# EAGLE board BigEasyDriver-Panel-v15 (EAGLE 6.4), part 1 of 6
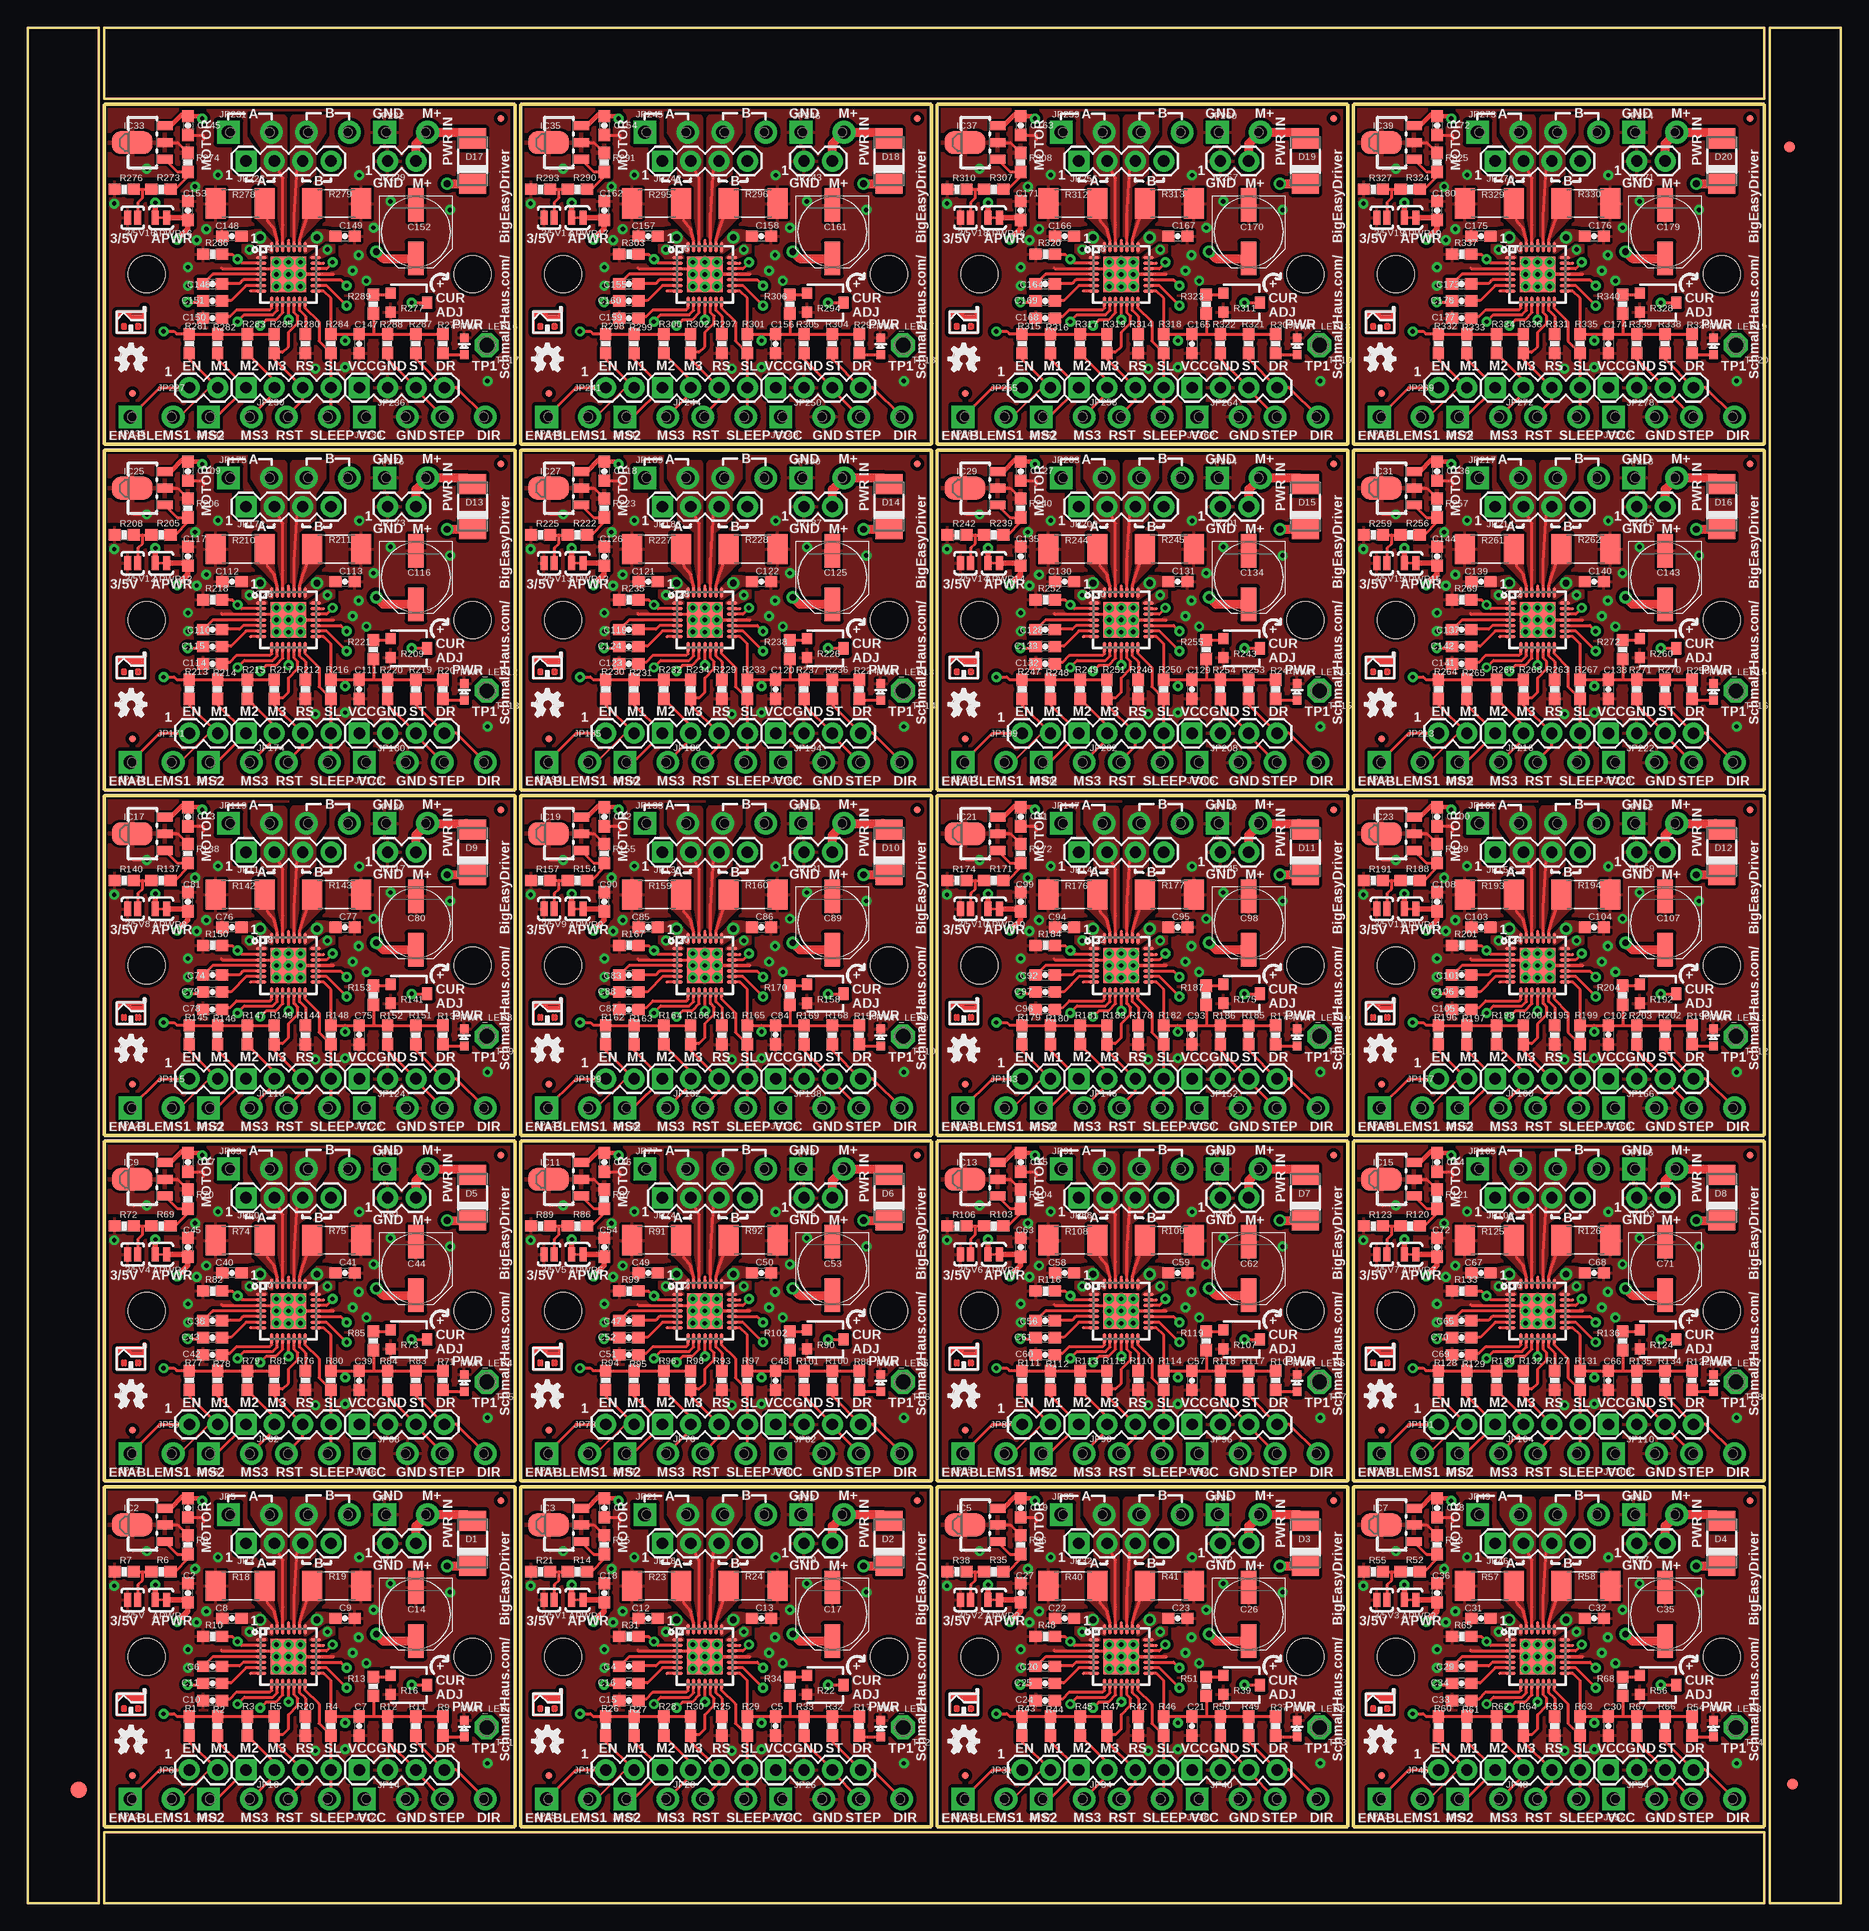
[diagram p0: board, top side]
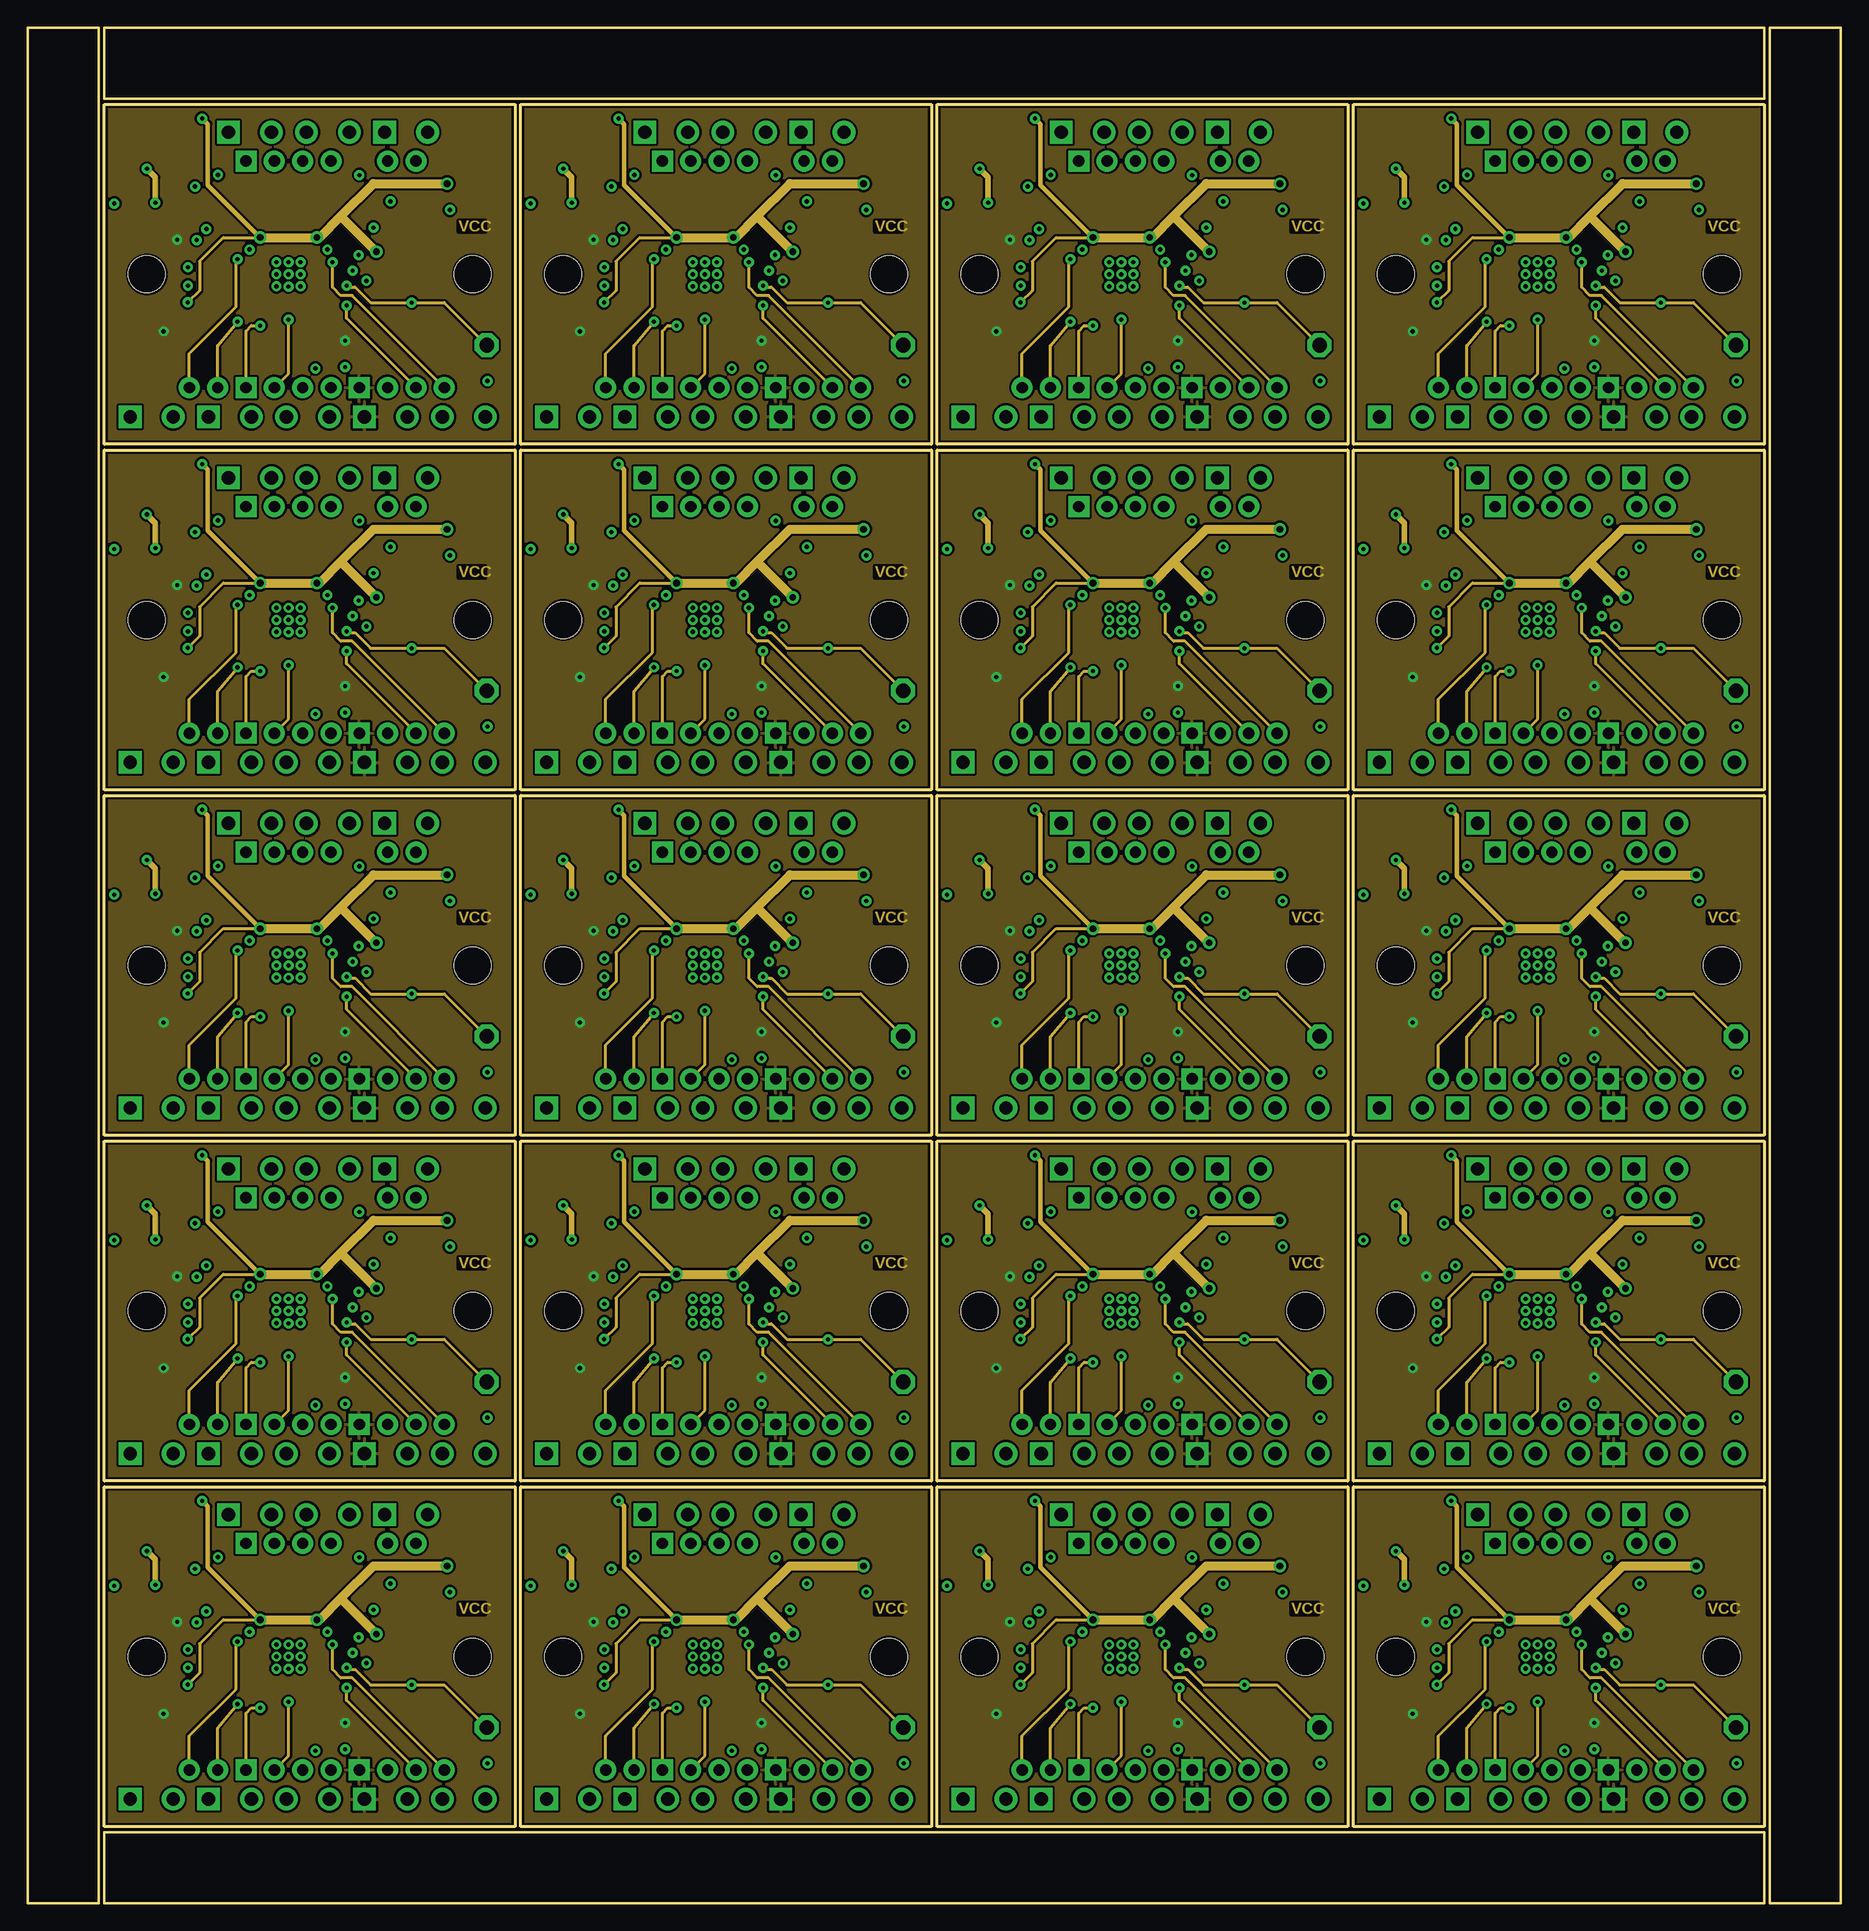
[diagram p1: board, inner layer VCC]
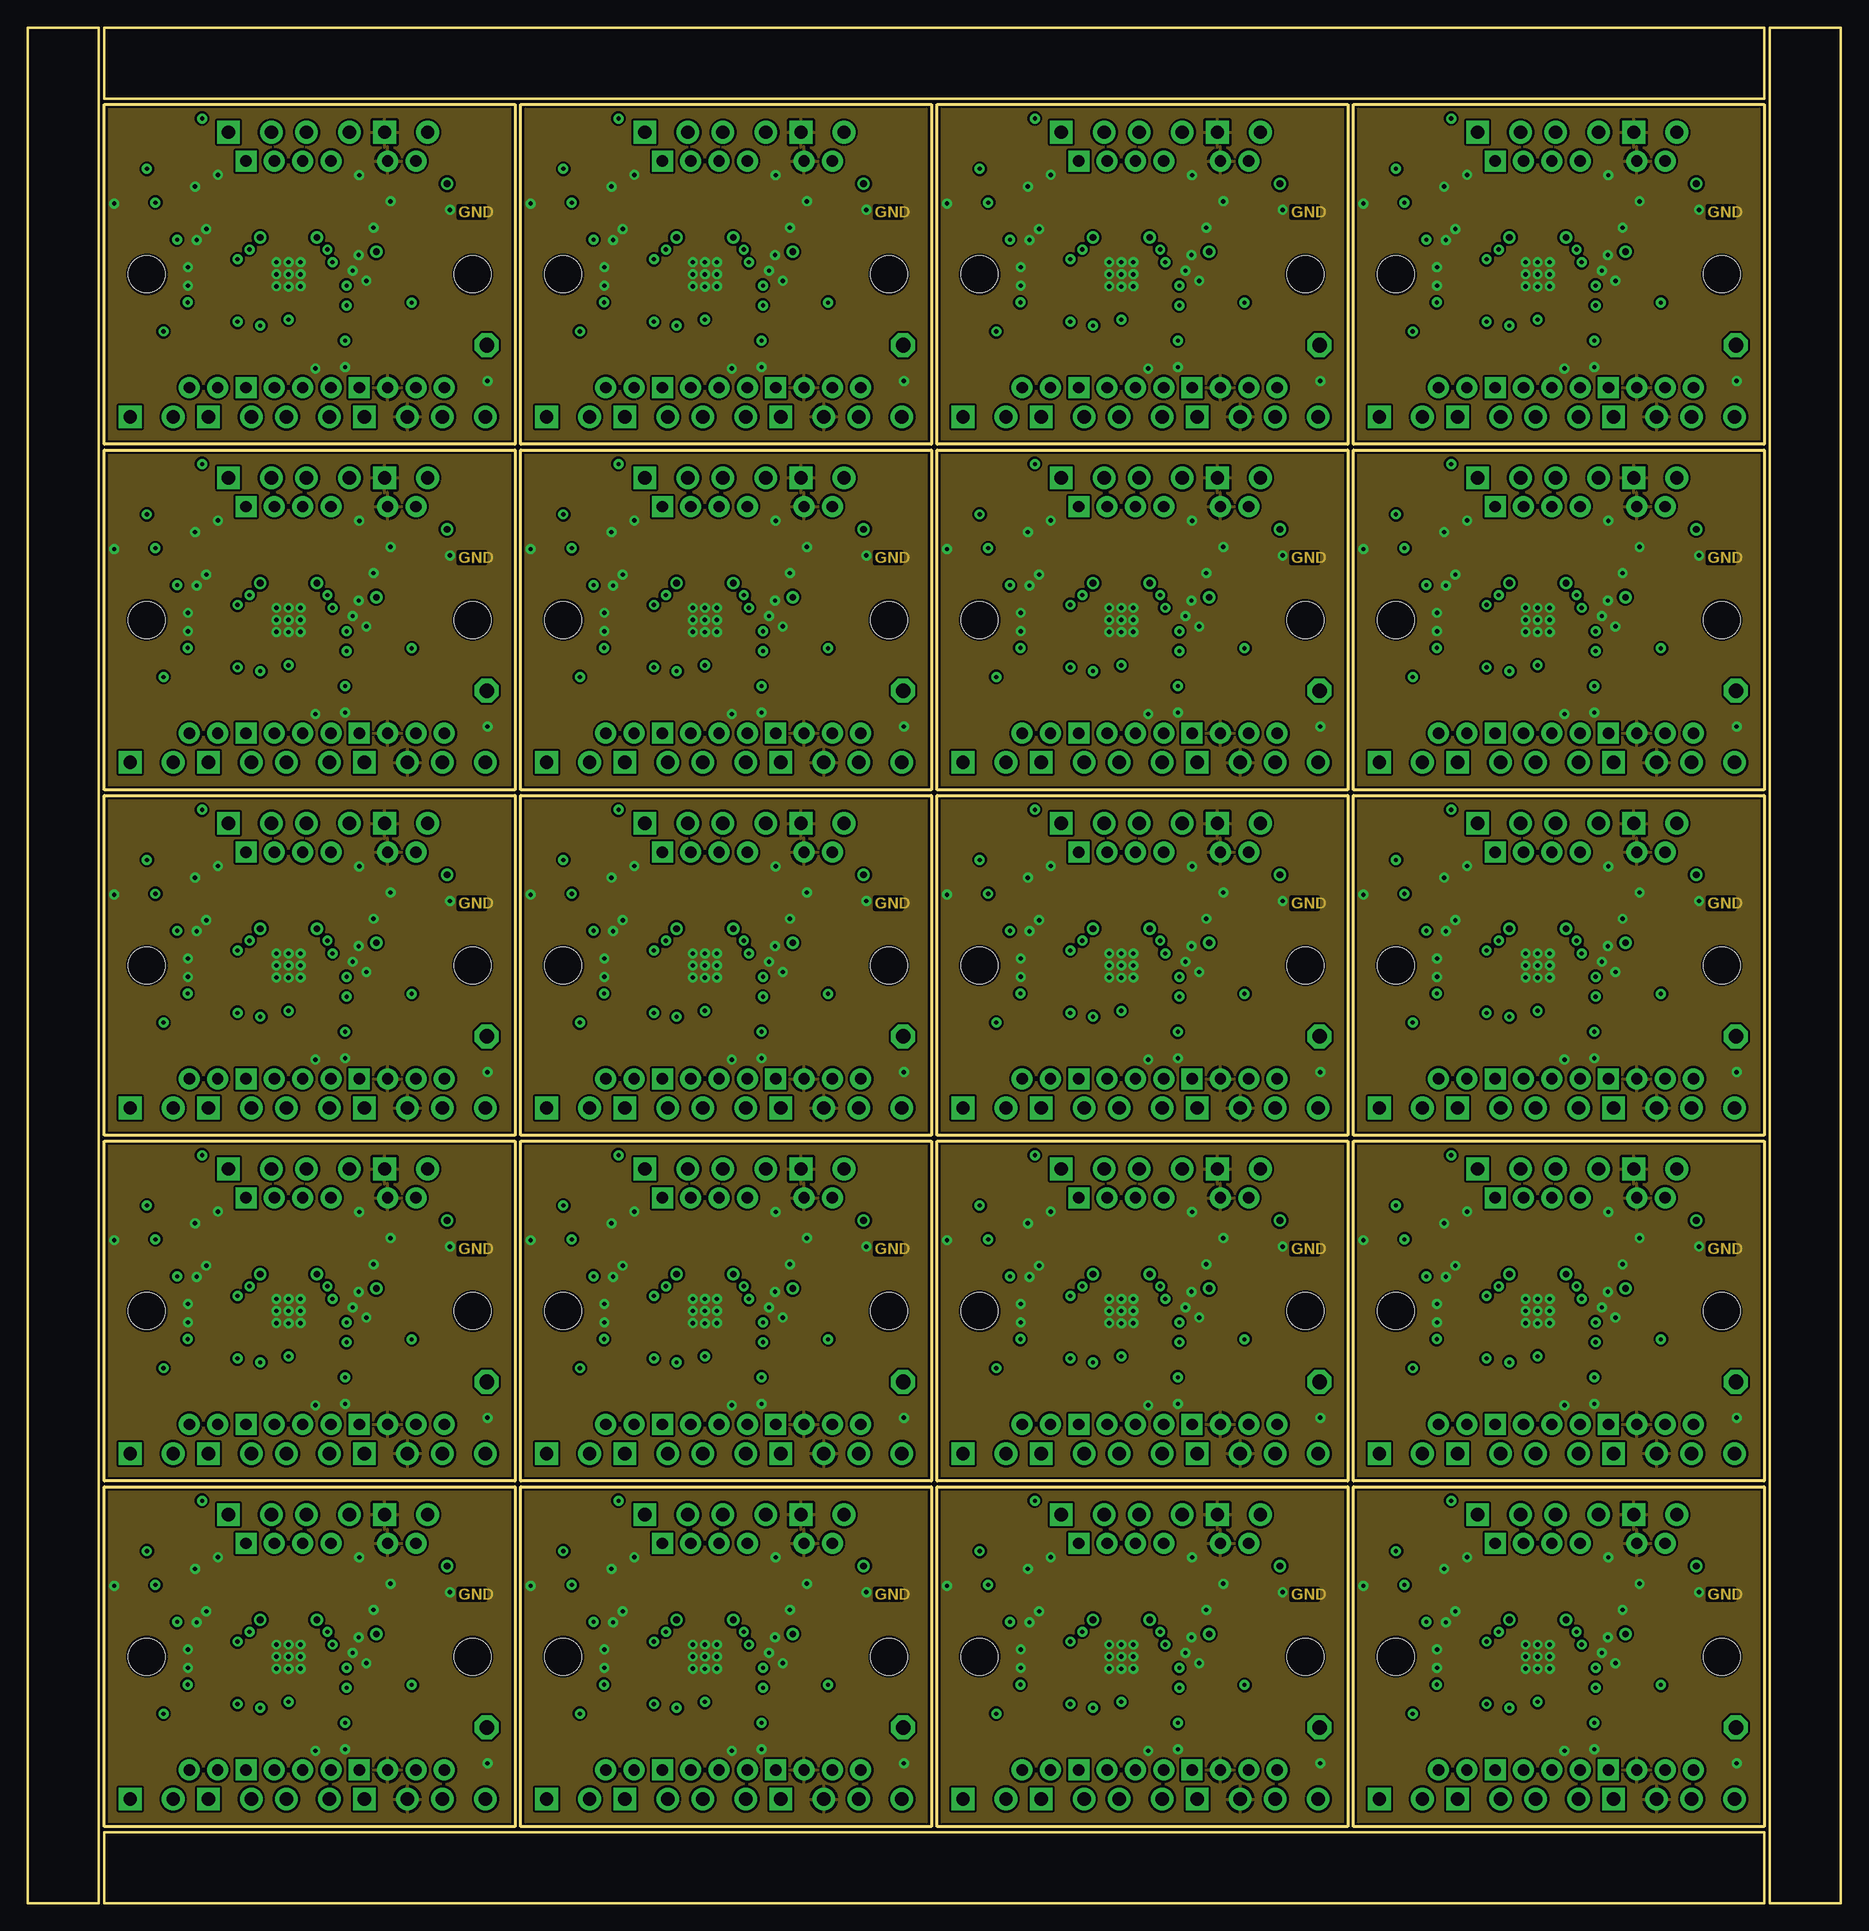
[diagram p2: board, inner layer GND]
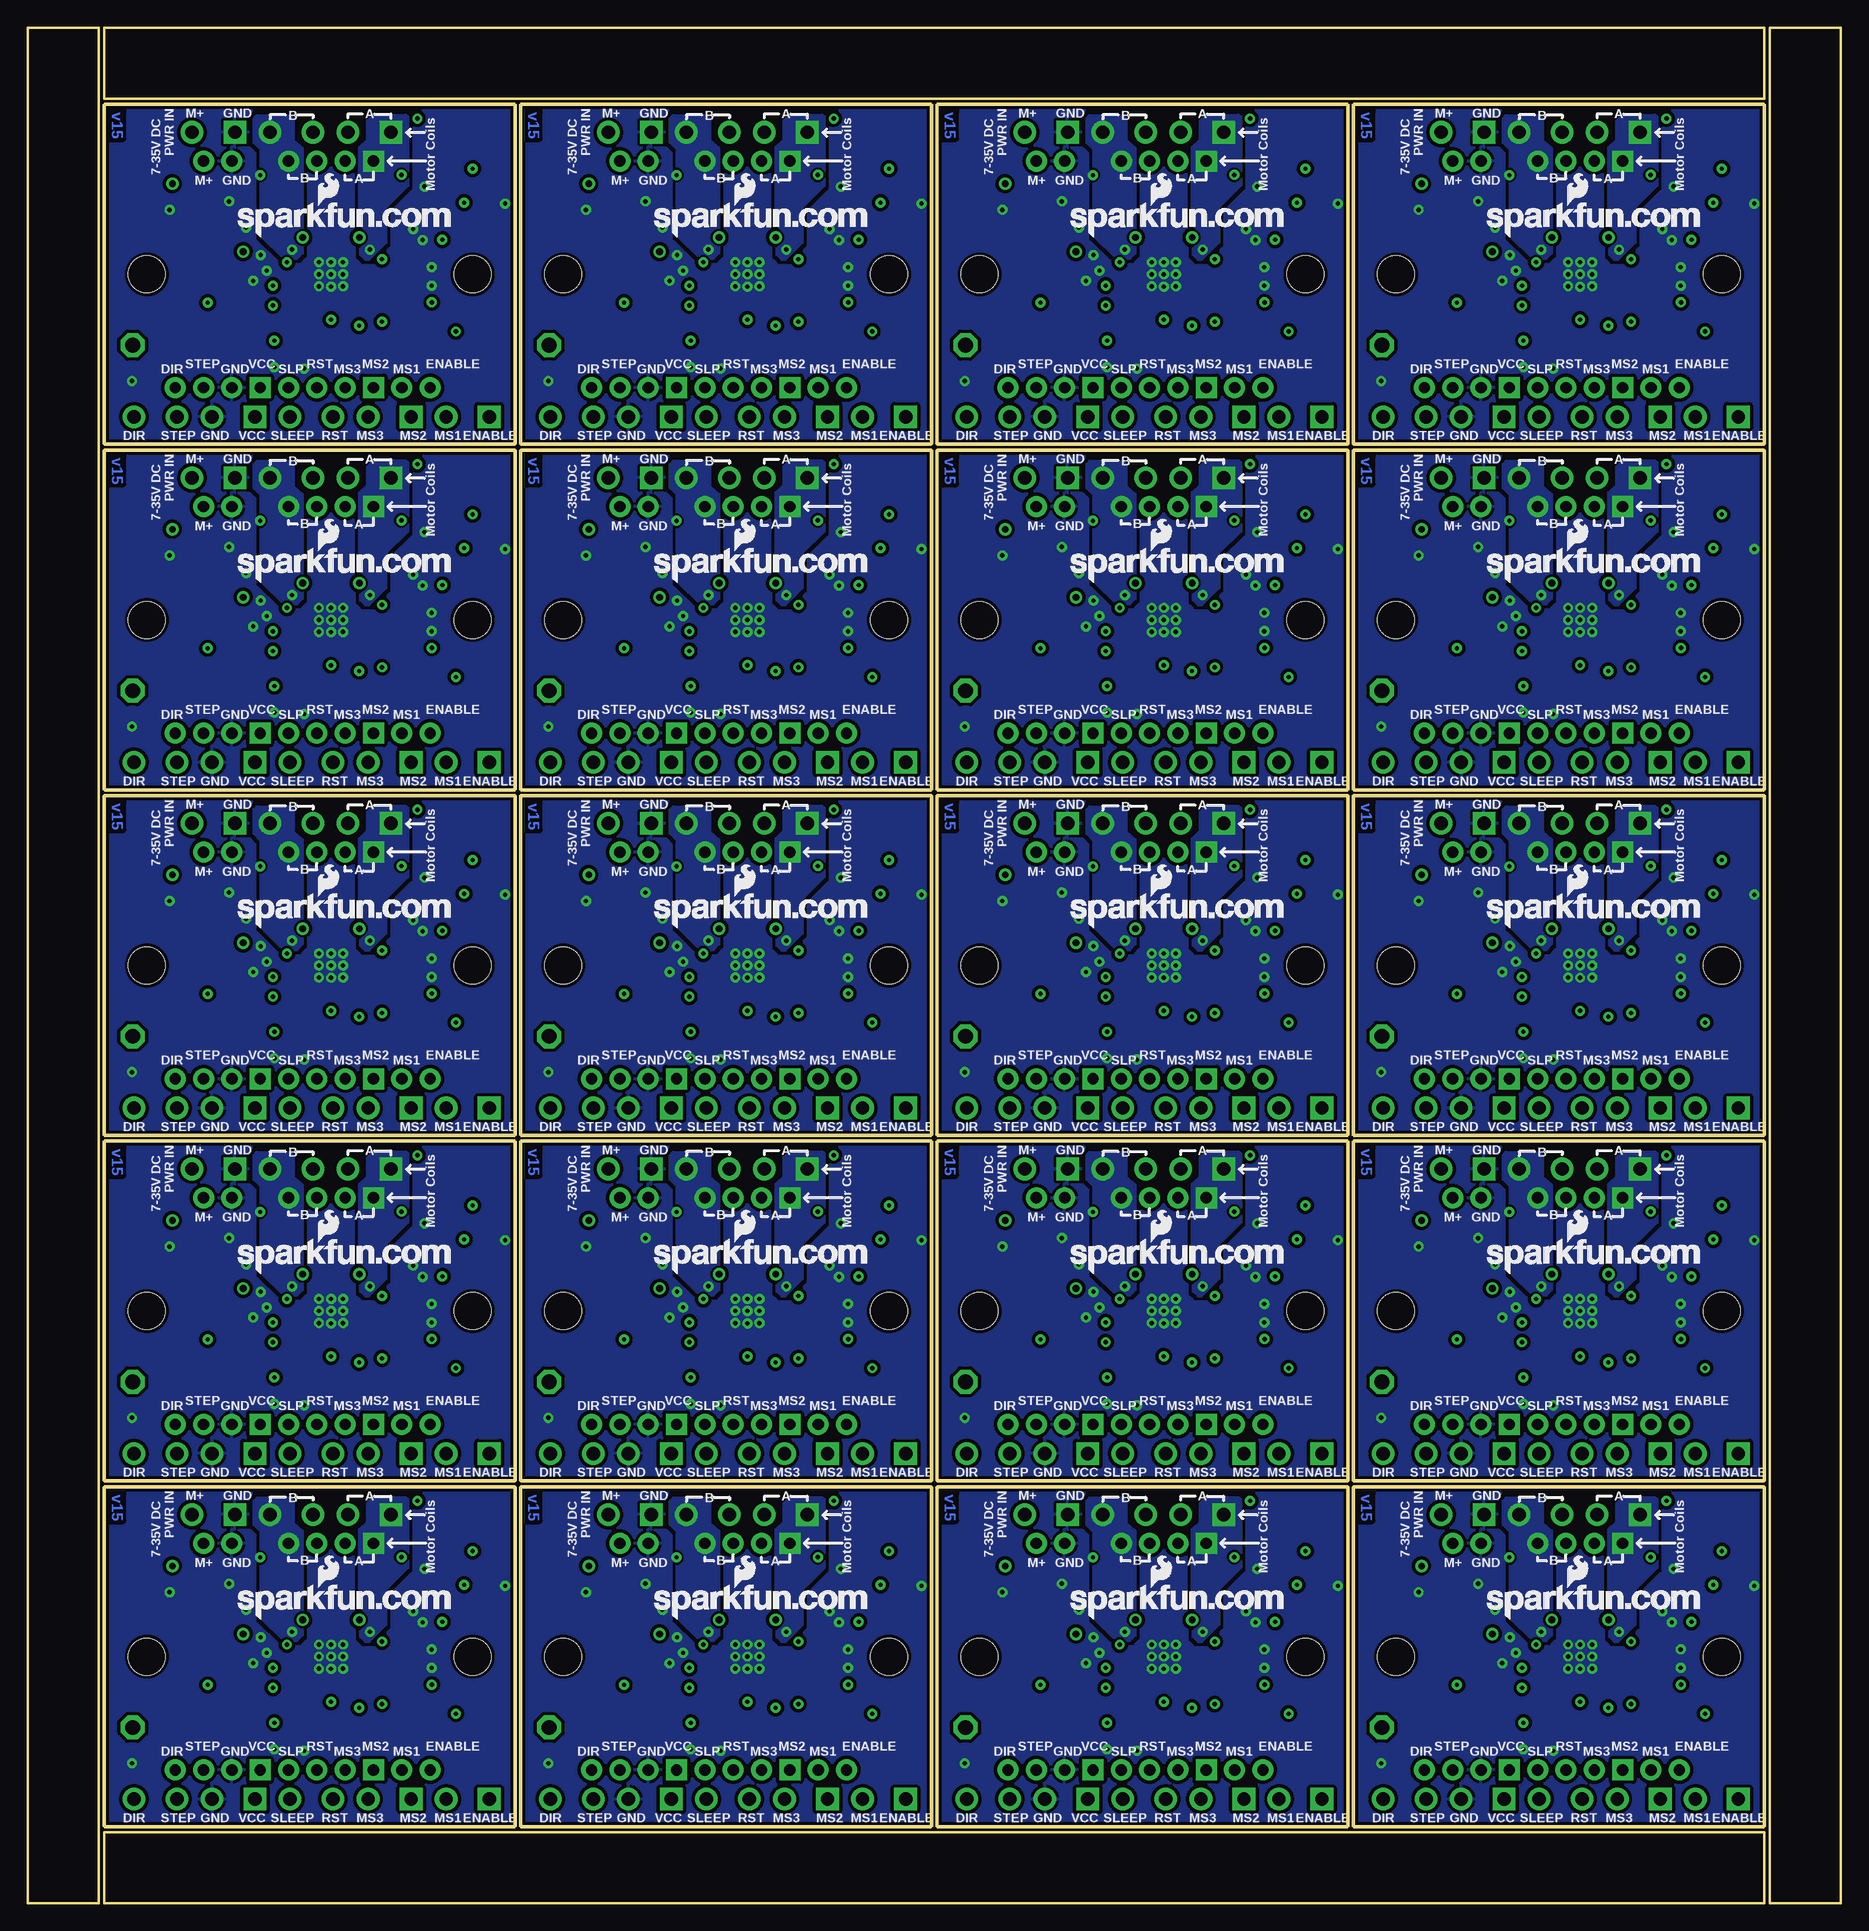
[diagram p3: board, bottom side, seen from below]

Size 162.56 x 168.15 mm. Coordinates in mm from the lower left corner, seen from the top.
Outline: 6.86,37.34 43.69,37.34 43.69,6.86 6.86,6.86 6.86,37.34
Outline: 44.2,37.34 81.03,37.34 81.03,6.86 44.2,6.86 44.2,37.34
Outline: 81.53,37.34 118.36,37.34 118.36,6.86 81.53,6.86 81.53,37.34
Outline: 118.87,37.34 155.7,37.34 155.7,6.86 118.87,6.86 118.87,37.34
Outline: 6.86,68.33 43.69,68.33 43.69,37.85 6.86,37.85 6.86,68.33
Outline: 44.2,68.33 81.03,68.33 81.03,37.85 44.2,37.85 44.2,68.33
Outline: 81.53,68.33 118.36,68.33 118.36,37.85 81.53,37.85 81.53,68.33
Outline: 118.87,68.33 155.7,68.33 155.7,37.85 118.87,37.85 118.87,68.33
Outline: 6.86,99.31 43.69,99.31 43.69,68.83 6.86,68.83 6.86,99.31
Outline: 44.2,99.31 81.03,99.31 81.03,68.83 44.2,68.83 44.2,99.31
Outline: 81.53,99.31 118.36,99.31 118.36,68.83 81.53,68.83 81.53,99.31
Outline: 118.87,99.31 155.7,99.31 155.7,68.83 118.87,68.83 118.87,99.31
Outline: 6.86,130.3 43.69,130.3 43.69,99.82 6.86,99.82 6.86,130.3
Outline: 44.2,130.3 81.03,130.3 81.03,99.82 44.2,99.82 44.2,130.3
Outline: 81.53,130.3 118.36,130.3 118.36,99.82 81.53,99.82 81.53,130.3
Outline: 118.87,130.3 155.7,130.3 155.7,99.82 118.87,99.82 118.87,130.3
Outline: 6.86,161.29 43.69,161.29 43.69,130.81 6.86,130.81 6.86,161.29
Outline: 44.2,161.29 81.03,161.29 81.03,130.81 44.2,130.81 44.2,161.29
Outline: 81.53,161.29 118.36,161.29 118.36,130.81 81.53,130.81 81.53,161.29
Outline: 118.87,161.29 155.7,161.29 155.7,130.81 118.87,130.81 118.87,161.29
Outline: 6.35,0 6.35,168.15 0,168.15 0,0 6.35,0
Outline: 6.86,0 155.7,0 155.7,6.35 6.86,6.35 6.86,0
Outline: 162.56,0 162.56,168.15 156.21,168.15 156.21,0 162.56,0
Outline: 155.7,168.15 6.86,168.15 6.86,161.8 155.7,161.8 155.7,168.15
Copper layers (1*16): Top 0.035mm / dielectric 1.5mm / Bottom 0.035mm
Design rules "SparkFun *": minimum track width 7mil, minimum drill 15mil, track to track 8mil, track to pad 8mil, pad to pad 8mil, via to via 8mil, smd to smd 8mil, copper to edge 8mil, drill to drill 8mil, minimum pad ring 12mil, minimum via ring 10mil, stop-mask expansion 4mil, vias tented up to drill 24mil, thermal gap 10mil

## Footprints (pad centres in the part's own frame; a part is rotated, then mirrored left to right if it is on the bottom)
SJ_2S-NO = smd 0.635 x 1.27: 1 -0.45,0; 2 0.45,0
SJ_2S-TRACE = smd 0.635 x 1.27: 1 -0.508,0; 2 0.508,0
0603-CAP = smd 1.1 x 1: 1 -0.85,0; 2 0.85,0
PANASONIC_D = smd 3 x 1.4: + 2.4,0; - -2.4,0
DO-214AC = smd 1.8 x 2.4: A 2.025,0; C -2.025,0
FIDUCIAL-1.5X3 = smd 1.5 x 1.5: 1 0,0
FIDUCIAL-1X2 = smd 1 x 1: 1 0,0
QFN-28-5MM_ALT1 = smd 0.94 x 0.3: P$1 -2.44,1.5; P$2 -2.44,1; P$3 -2.44,0.5; P$4 -2.44,0; P$5 -2.44,-0.5; P$6 -2.44,-1; P$7 -2.44,-1.5; P$15 2.44,-1.5; P$16 2.44,-1; P$17 2.44,-0.5; P$18 2.44,0; P$19 2.44,0.5; P$20 2.44,1; P$21 2.44,1.5 | smd 0.3 x 0.94: P$8 -1.5,-2.44; P$9 -1,-2.44; P$10 -0.5,-2.44; P$11 0,-2.44; P$12 0.5,-2.44; P$13 1,-2.44; P$14 1.5,-2.44; P$22 1.5,2.44; P$23 1,2.44; P$24 0.5,2.44; P$25 0,2.44; P$26 -0.5,2.44; P$27 -1,2.44; P$28 -1.5,2.44 | smd 3.175 x 3.175: P$29 0,0
SCHMALZHAUS_SOT89 = smd 0.8 x 1.4: ADJ -1.499,-1.981; IN 1.499,-1.981; OUT 0,-1.98 | smd 2.032 x 3.65: OUT@1 0,0.94
1X02 = drill 1.016 pad 1.88: 1 0,0; 2 2.54,0
FIDUCIAL-1X2.5 = smd 0.635 x 0.635: 1 0,0
1X04 = drill 1.016 pad 1.88 square: 1 0,0 | drill 1.016 pad 1.88: 2 2.54,0; 3 5.08,0; 4 7.62,0
SCREWTERMINAL-3.5MM-4_LOCK = drill 1.2 pad 2.032 square: 1 -0.178,0 | drill 1.2 pad 2.032: 2 3.678,0; 3 6.822,0; 4 10.678,0
SCREWTERMINAL-3.5MM-2_LOCK = drill 1.2 pad 2.032 square: 1 -0.178,0 | drill 1.2 pad 2.032: 2 3.678,0
STAND-OFF = hole 3.302: 0,0
LED-0603 = smd 0.8 x 0.8: A 0,-0.75; C 0,0.75
0603-RES = smd 1.1 x 1: 1 -0.85,0; 2 0.85,0
TRIMPOT-3MM = smd 1 x 0.9: 1 -0.85,-1.65; 3 0.85,-1.65 | smd 1.1 x 0.9: 2 0,1.65
R2010 = smd 1.8 x 2.7: 1 -2.2,0; 2 2.2,0
P1-13 = drill 1.321 pad 2.159 octagon: TP 0,0
PAD-0.008 = smd 0.203 x 0.203: P$1 0,0